# Altium PCB CTA2045v1.2.PcbDoc
Units mil, origin at the board's own origin, x right, y up, seen from the top; angles counter-clockwise.
Board outline 3700.79 x 1574.8 mil, 2 copper layers (Top Layer, Bottom Layer); 16 components, 27 nets, 98 pads, 175 vias.
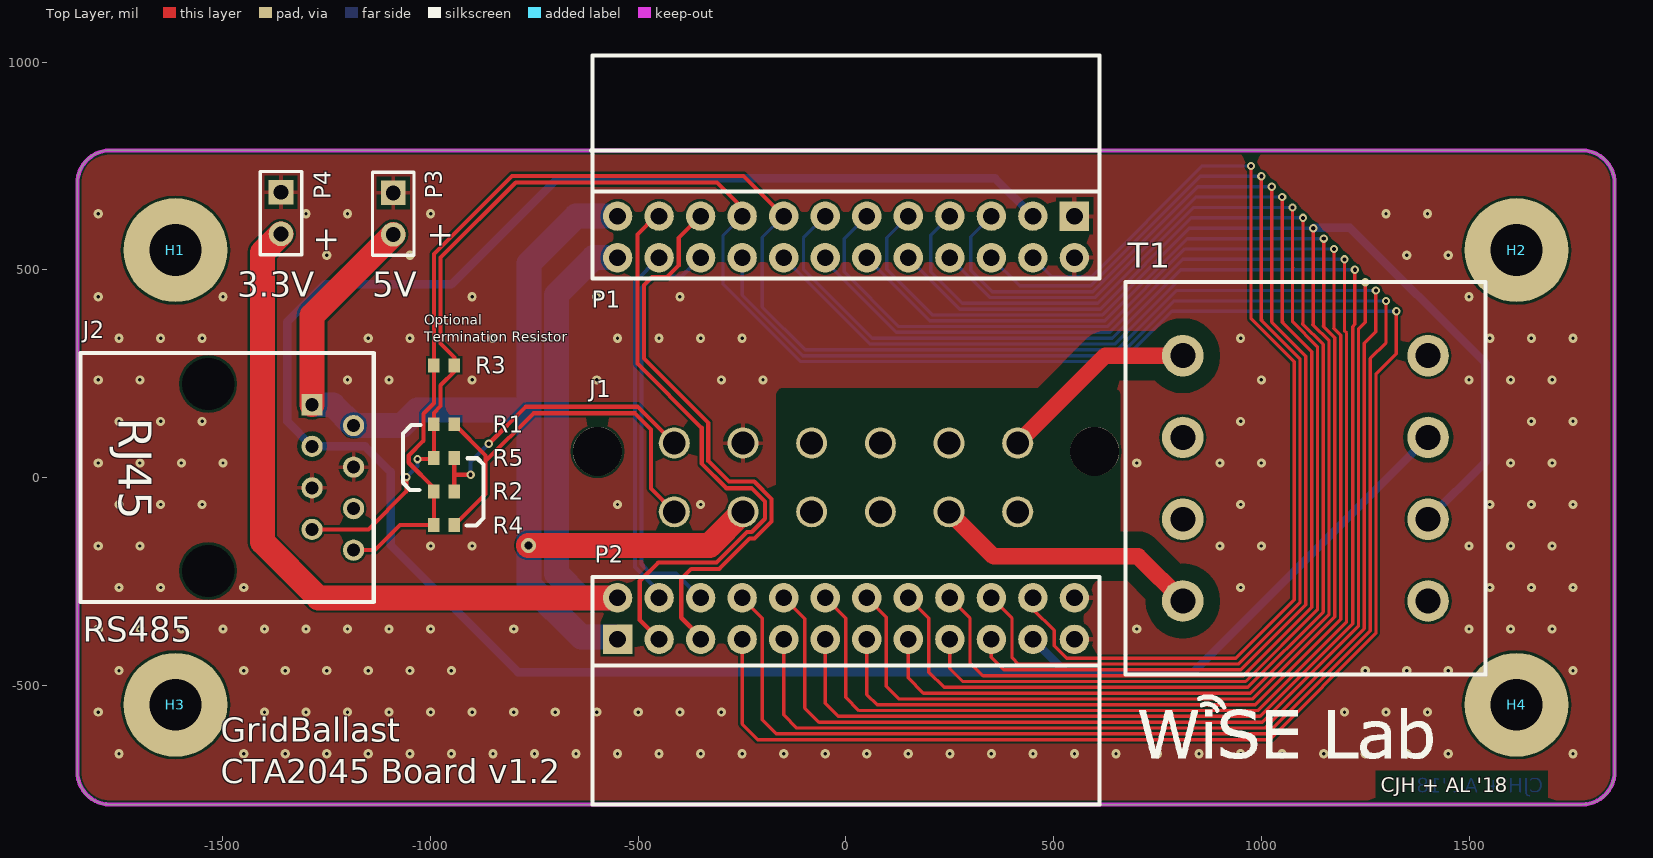
[diagram p0: Top Layer view]
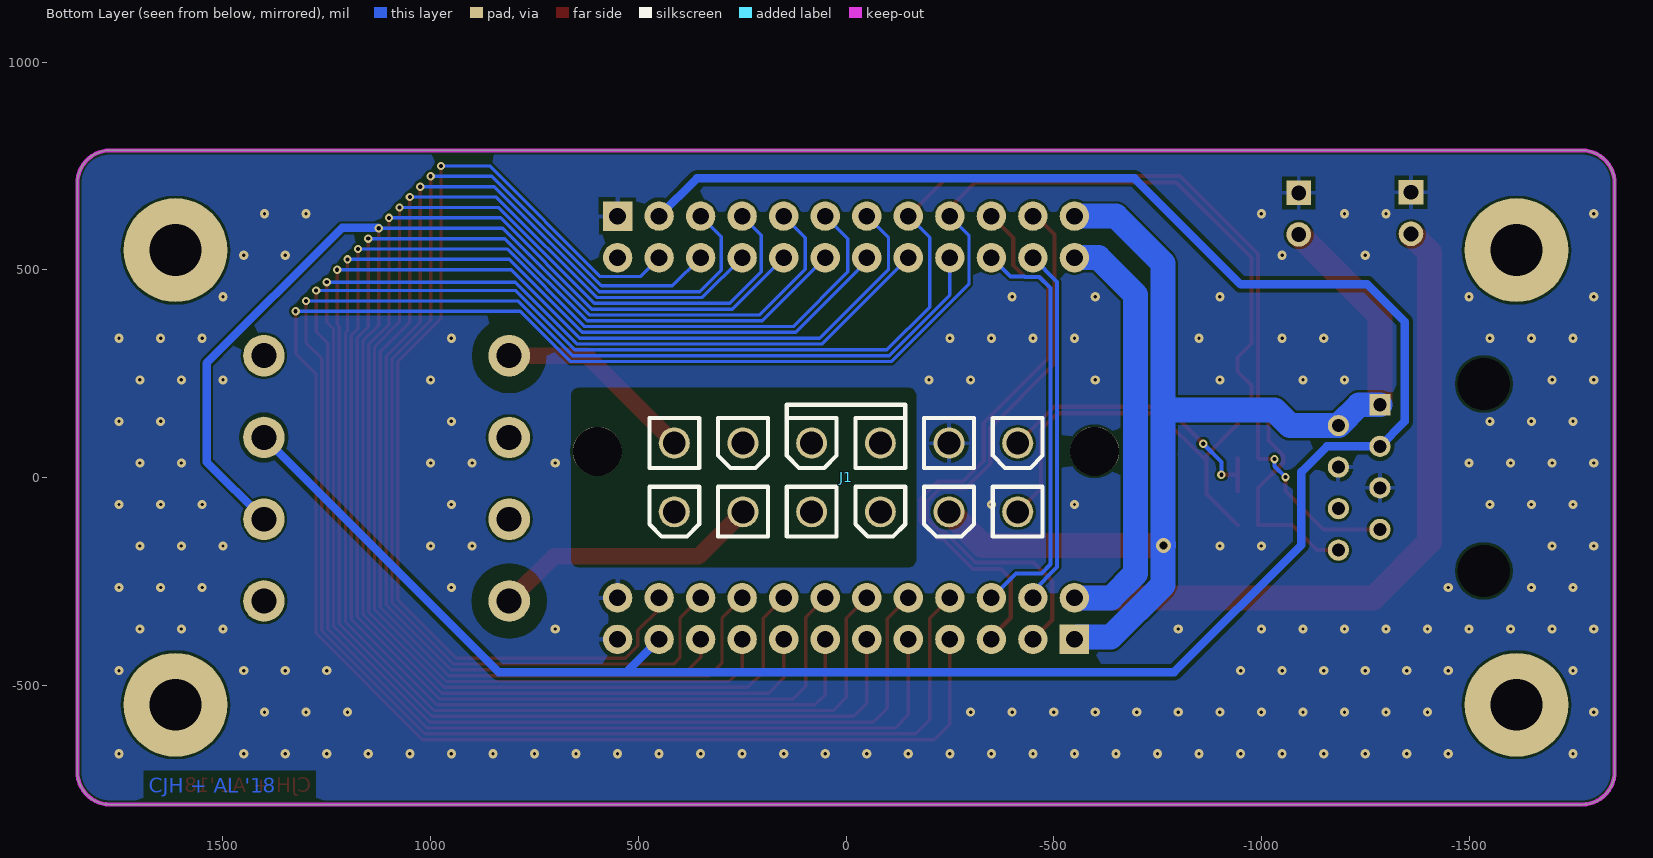
[diagram p1: Bottom Layer view, seen from below]

## Layer stack, top to bottom
Top Solder: solder mask 0.4, Solder Resist, Dk 3.5
Top Layer: signal copper 1.4
Dielectric 1: dielectric 12.6, FR-4, Dk 4.8
Bottom Layer: signal copper 1.4
Bottom Solder: solder mask 0.4, Solder Resist, Dk 3.5

## Board outline
-1771.65,787.4 1771.65,787.4 cw(c1771.65,708.66) 1850.39,708.66 1850.39,-708.66 cw(c1771.65,-708.66) 1771.65,-787.4 -1771.65,-787.4 cw(c-1771.65,-708.66) -1850.39,-708.66 -1850.39,708.66 cw(c-1771.65,708.66)

## Design rules (kind name [scope] priority, off if disabled: settings)
BoardOutlineClearance "BoardOutlineClearance - RJ45" [HasFootprint('RJ45 Unshielded PTH Connector')] p1: gap=0 ignorepadtopadclearanceinfootprint=FALSE
BoardOutlineClearance "BoardOutlineClearance - 4.2mm Pitch" [HasFootprint('2POS 4.2MM PITCH RIGHT ANGLE')] p2: gap=0 ignorepadtopadclearanceinfootprint=FALSE
BoardOutlineClearance "BoardOutlineClearance - Right Angle 0.1inch" [HasFootprint('0.1 INCH 2 ROW 24 POS FEMALE RIGHT-ANGLE HEADER SULLINS') or HasFootprint('0.1 inch 2 row 24 pos male right-angle header Sullins')] p3: gap=0 ignorepadtopadclearanceinfootprint=FALSE
BoardOutlineClearance "BoardOutlineClearance - MicroUSB" [HasFootprint('MicroUSB_TypeB')] p4: gap=0 ignorepadtopadclearanceinfootprint=FALSE
BoardOutlineClearance "BoardOutlineClearance - ESP32" [HasFootprint('ESP-WROOM-32')] p5: gap=0 ignorepadtopadclearanceinfootprint=FALSE
BoardOutlineClearance [All] p6: gap=10 ignorepadtopadclearanceinfootprint=FALSE
Clearance Clearance_1 [InNet('AC_L')] p1: gap=40 ignorepadtopadclearanceinfootprint=FALSE
Clearance Clearance_2 [InNet('AC_N')] p2: gap=40 ignorepadtopadclearanceinfootprint=FALSE
Clearance "Clearance - 60HzAnt" [InNet('60HzAnt')] p3: gap=10 ignorepadtopadclearanceinfootprint=FALSE
Clearance "Clearance - Keepout Ignore" [All vs IsKeepOut] p4: gap=0 ignorepadtopadclearanceinfootprint=FALSE
Clearance "Clearance - Antenna" [InNetClass('RF50')] p5: gap=12 ignorepadtopadclearanceinfootprint=FALSE
Clearance [All] p6: gap=6 ignorepadtopadclearanceinfootprint=FALSE
ComponentClearance "Ignore Enclosure Part" [InComponent('H1')] p1: gap=0 collisioncheckmode=3 verticalgap=0 showdistances=FALSE
DiffPairsRouting [All] p1: maxlimit=10 minlimit=6 mostfreqgap=10 toplayer_minwidth=6 toplayer_maxwidth=15 toplayer_prefwidth=10 bottomlayer_minwidth=6 bottomlayer_maxwidth=15 bottomlayer_prefwidth=10 maxuncoupledlength=500
HoleSize [All] p1: absolutevalues=TRUE maxlimit=500 minlimit=8 maxpercent=80.000 minpercent=20.000
MinimumSolderMaskSliver "MinimumSolderMaskSliver - Jumpers3" [HasFootprint('PAD-JUMPER-3-2OF3_NC_BY_TRACE_YES_SILK_FULL_BOX') vs HasFootprint('PAD-JUMPER-3-2OF3_NC_BY_TRACE_YES_SILK_FULL_BOX')] p1: minsoldermaskwidth=0
MinimumSolderMaskSliver "MinimumSolderMaskSliver - Jumpers2" [HasFootprint('PAD-JUMPER-2-NO_NO_SILK') vs HasFootprint('PAD-JUMPER-2-NO_NO_SILK')] p2: minsoldermaskwidth=0
MinimumSolderMaskSliver "MinimumSolderMaskSliver - Jumpers1" [HasFootprint('PAD-JUMPER-2-NC_BY_TRACE_NO_SILK') vs HasFootprint('PAD-JUMPER-2-NC_BY_TRACE_NO_SILK')] p3: minsoldermaskwidth=0
MinimumSolderMaskSliver "MinimumSolderMaskSliver - FTDI" [HasFootprint('PQFN5X5-32_V_FTDI_BIG_VIAS_LEADS') vs HasFootprint('PQFN5X5-32_V_FTDI_BIG_VIAS_LEADS')] p4: minsoldermaskwidth=0
MinimumSolderMaskSliver [All] p5: minsoldermaskwidth=4
NetAntennae [Not InNet('60HzAnt')] p1: netantennaetolerance=0
PolygonConnect "PolygonConnect - ViaStitching" [IsStitchingVia] p1: connectstyle=Direct reliefconductorwidth=10 reliefentries=4 polygonreliefangle="90 Angle" airgapwidth=10
PolygonConnect [All] p2: connectstyle=Relief reliefconductorwidth=10 reliefentries=4 polygonreliefangle="90 Angle" airgapwidth=10
RoutingVias [All] p1: holewidth=10 width=20 viastyle="Through Hole" minholewidth=8 minwidth=16 maxholewidth=50 maxwidth=100
ShortCircuit "ShortCircuit - FTDI" [HasFootprint('PQFN5X5-32_V_FTDI_BIG_VIAS_LEADS') and IsPad vs HasFootprint('PQFN5X5-32_V_FTDI_BIG_VIAS_LEADS') and (IsPolygon or IsRegion)] p1: allowed=TRUE
ShortCircuit ExemptJumpers [HasFootprint('PAD-JUMPER-2-NC_BY_TRACE_NO_SILK') or HasFootprint('PAD-JUMPER-3-2OF3_NC_BY_TRACE_YES_SILK_FULL_BOX')] p2: allowed=TRUE
ShortCircuit [All] p3: allowed=FALSE
SilkToSilkClearance [All] p1: silktosilkclearance=5
SilkToSolderMaskClearance [IsPad] p1: minsilkscreentomaskgap=0 clearancetoexposedcopper=TRUE
SolderMaskExpansion [All] p1: expansion=2
Width "Width - Antenna" [InNetClass('RF50')] p1: maxlimit=10000 minlimit=6 preferedwidth=10 impedancedriven=TRUE minimp=50.000000 maximp=50.000000 favimp=50.000000
Width [All] p2: maxlimit=10000 minlimit=6 preferedwidth=10 minimp=50.000000 maximp=50.000000 favimp=50.000000
22 further rules are at their usual default settings.

## Components (designator, comment, footprint, x,y, rotation, side; value= is the part's Value field where it differs from the comment)
H1 "1/8in Hole by 1/4in Ring Fastener" "1/8in Fastener Hole" -1614.17,547.24 r0 top locked
H2 "1/8in Hole by 1/4in Ring Fastener" "1/8in Fastener Hole" 1614.17,547.24 r0 top locked
H3 "1/8in Hole by 1/4in Ring Fastener" "1/8in Fastener Hole" -1614.17,-547.24 r0 top locked
H4 "1/8in Hole by 1/4in Ring Fastener" "1/8in Fastener Hole" 1614.17,-547.24 r0 top locked
J1 "TE 1-1586586-2" "12POS 4.2mm Pitch Vertical" 0,0 r0 bottom locked
J2 "RS485" "RJ45 Unshielded PTH Connector" -1535.43,0 r270 top locked
P1 "0.1\" Pitch, 2 Row, 24 Pos, Male Right-Angle" "0.1 inch 2 row 24 pos male right-angle header Sullins" 0,579.13 r180 top locked
P2 "0.1\" Pitch, 2 Row, 24 Pos, Female, Right-Angle" "0.1 inch 2 row 24 pos female right-angle header Sullins" 0,-339.76 r0 top locked
P3 "5V" HDR1X2 -1090,685 r270 top
P4 "3.3V" HDR1X2 -1360.15,686.35 r270 top
R1 "0" "RESC1608X06L - RES0603" -967.58,128 r0 top
R2 "0" "RESC1608X06L - RES0603" -967.58,-33.86 r0 top
R3 "120" "RESC1608X06L - RES0603" -967.58,270 r180 top
R4 "0" "RESC1608X06L - RES0603" -967.58,-114.79 r0 top
R5 "0" "RESC1608X06L - RES0603" -967.58,47.07 r0 top
T1 "SPK00304" SPK003 1106.1,-2.15 r270 top

## Footprints (in the part's own frame and the unit in brackets; to place one, negate y for a bottom-side part, rotate by r counter-clockwise, add the part's x,y. Pads: shape width x height; smd on the part's side, far side on the other; paste and mask are expansions set on the pad)
"0.1 inch 2 row 24 pos female right-angle header Sullins" [mm] "Sullins 0.1\" Dual row 24 position female right-angle header"
  rect 1.8x1.8 hole 1.02: 1(-13.97,-1.27)
  round 1.8 hole 1.02: 2(-13.97,1.27) 3(-11.43,-1.27) 4(-11.43,1.27) 5(-8.89,-1.27) 6(-8.89,1.27) 7(-6.35,-1.27) 8(-6.35,1.27) 9(-3.81,-1.27) 10(-3.81,1.27) 11(-1.27,-1.27) 12(-1.27,1.27) 13(1.27,-1.27) 14(1.27,1.27) 15(3.81,-1.27) 16(3.81,1.27) 17(6.35,-1.27) 18(6.35,1.27) 19(8.89,-1.27) 20(8.89,1.27) 21(11.43,-1.27) 22(11.43,1.27) 23(13.97,-1.27) 24(13.97,1.27)
  silkscreen extent -15.5,-11.37 15.5,2.54, body extent -15.49,-11.34 15.49,1.5, height 5.08
"0.1 inch 2 row 24 pos male right-angle header Sullins" [mm] "Sullins 0.1\" Dual row 24 position male right-angle header"
  rect 1.8x1.8 hole 1.02: 1(-13.97,-1.27)
  round 1.8 hole 1.02: 2(-13.97,1.27) 3(-11.43,-1.27) 4(-11.43,1.27) 5(-8.89,-1.27) 6(-8.89,1.27) 7(-6.35,-1.27) 8(-6.35,1.27) 9(-3.81,-1.27) 10(-3.81,1.27) 11(-1.27,-1.27) 12(-1.27,1.27) 13(1.27,-1.27) 14(1.27,1.27) 15(3.81,-1.27) 16(3.81,1.27) 17(6.35,-1.27) 18(6.35,1.27) 19(8.89,-1.27) 20(8.89,1.27) 21(11.43,-1.27) 22(11.43,1.27) 23(13.97,-1.27) 24(13.97,1.27)
  silkscreen extent -15.5,-11.1 15.6,2.54, body extent -15.24,-11.12 15.24,1.6, height 5.04
"1/8in Fastener Hole" [mil]
  round 250 hole 125: 1(0,0)
"12POS 4.2mm Pitch Vertical" [mm] "TE Connectivity 1-1586586-2"
  round 3 hole 3 unplated: 0(-15.2,-1.6) 0(15.2,-1.6)
  round 1.9 hole 1.4: 1(-10.5,2.1) 2(-6.3,2.1) 3(-2.1,2.1) 4(2.1,2.1) 5(6.3,2.1) 6(10.5,2.1) 7(-10.5,-2.1) 8(-6.3,-2.1) 9(-2.1,-2.1) 10(2.1,-2.1) 11(6.3,-2.1) 12(10.5,-2.1)
  silkscreen extent -12.02,-4.44 12.02,3.62
HDR1X2 [mm] "Connector; Header; 2 Position"
  rect 1.5x1.5 hole 0.9: 1(0,0)
  round 1.5 hole 0.9: 2(2.54,0)
  silkscreen extent -1.27,-1.27 3.81,1.27
"RESC1608X06L - RES0603" [mm] "Chip Resistor, 2-Leads, Body 1.60x0.80mm, IPC High Density"
  rect 0.7x0.85 smd: 1(-0.625,0) 2(0.625,0)
  body extent -0.87,-0.48 0.87,0.48, height 0.55
"RJ45 Unshielded PTH Connector" [mm] "Amphenol 54601-908WPLF Unshielded RJ45 PTH Connector"
  round 0 hole 3.2 unplated: 0(-5.716,0) 0(5.716,0)
  rect 1.3x1.3 hole 0.8: 1(-4.444,6.35)
  round 1.3 hole 0.8: 2(-3.174,8.89) 3(-1.904,6.35) 4(-0.634,8.89) 5(0.636,6.35) 6(1.906,8.89) 7(3.176,6.35) 8(4.446,8.89)
  silkscreen extent -7.62,-7.8 7.62,10.12, body extent -7.62,-7.8 7.62,10.2, height 11.5
SPK003 [mm]
  round 2.54 hole 1.524: 1(-7.5,-7.5) 2(-2.5,-7.5) 3(2.5,-7.5) 4(7.5,-7.5) 5(-7.5,7.5) 6(-2.5,7.5) 7(2.5,7.5) 8(7.5,7.5)
  silkscreen extent -12,-11 12,11, body extent -12,-11 12,11, height 15

## Part data
H1 H2 H3 H4: library part "1/8in by 1/4in Fastner Hole"
J1: library part "12POS 4.2mm Pitch Vertical", "TE Connectivity 1-1586586-2", Supplier Part Number 1=70041598, Supplier 1=Allied, Supplier 2=Digi-Key, Supplier Part Number 2=1-1586586-2-ND
J2: library part "RJ45 Unshielded PTH Connector", "Amphenol RJ45 Unshielded Through-Hole Connector", Colour=Black, Contact Resistance=30mR, Current Rating=1A, Flammability Rating="UL94 V-0", Insulation Resistance=500MR, Manufacturer="Amphenol FCI", Manufacturer Part Number=54601-908WPLF, Max Operating Temperature=125°C, Min Operating Temperature=-65°C, Package Quantity=200, Supplier Part Number 1=609-5081-ND, Voltage Rating=1kV, ComponentLink1Description=https://datasheet.ciiva.com/9396/c-bmj-0051-9396388.pdf, ComponentLink1URL=https://datasheet.ciiva.com/9396/c-bmj-0051-9396388.pdf, ComponentLink2Description=https://datasheet.ciiva.com/26824/getdatasheetpartid-465238-26824373.pdf, ComponentLink2URL=https://datasheet.ciiva.com/26824/getdatasheetpartid-465238-26824373.pdf, ComponentLink3Description=https://datasheet.ciiva.com/1108/c-bmj-0051-1108424.pdf, ComponentLink3URL=https://datasheet.ciiva.com/1108/c-bmj-0051-1108424.pdf, ComponentLink4Description=https://datasheet.ciiva.com/15058/c-bmj-0051-15058750.pdf, ComponentLink4URL=https://datasheet.ciiva.com/15058/c-bmj-0051-15058750.pdf, ComponentLink5Description=https://datasheet.ciiva.com/16650/c-bmj-0051-16650286.pdf, ComponentLink5URL=https://datasheet.ciiva.com/16650/c-bmj-0051-16650286.pdf, ComponentLink6Description=https://datasheet.ciiva.com/7629/c-bmj-0051-7629183.pdf, ComponentLink6URL=https://datasheet.ciiva.com/7629/c-bmj-0051-7629183.pdf, Connector Type=RJ45, Contact Material=Bronze,Copper, Contact Plating=Nickel,Gold, Depth=18mm, Direction=Down, Gender=Male, Housing Colour=Black, Housing Material=Polyamide, Lead Free="Lead Free", Length=15.24mm, Mount="Through Hole", Number of Contacts=8, Number of Ports=1, Number of Positions=8, Number of Positions Loaded=8, Number of Rows=1, Orientation="Right Angle", Packaging=Rail/Tube, Pitch=2.54mm, Pricing 2="1=0.51, 10=0.377, 50=0.377, 100=0.362, 1000=0.26, 10000=0.212 (USD)", Radiation Hardening=No, REACH SVHC="No SVHC", Shielding=Unshielded, Stock 2=0, Supplier 1=Digi-Key, Supplier 2=Mouser, Supplier Part Number 2=649-54601-908WPLF, Termination="Through Hole"
P1: library part "0.1\" 2 row 24 position male right-angle header sullins", "Sullins 0.1\" 2 row 24 position male right-angle header", Supplier Part Number 1=S2112EC-12-ND, Gender=Male, Pitch=2.54mm, Positions=24, Rows=2, Supplier 1=Digi-Key
P2: library part "0.1\" 2 row 24 position female right-angle header sullins", "Sullins 0.1\" 2 row 24 position female right-angle header", Supplier Part Number 1=S5526-ND, Pitch=2.54mm, Positions=24, Rows=2, Supplier 1=Digi-Key, Supplier 2=Digi-Key, Supplier Part Number 2=S5565-ND
P3 P4: library part "Header 2", "Header, 2-Pin", LatestRevisionDate=17-Jul-2002, LatestRevisionNote="Re-released for DXP Platform.", Publisher="Altium Limited"
R1 R2 R4 R5: library part "RES0603 0 Jumper 1/10W", "SMT 0603 Ceramic Resistor", Power=1/10W, Supplier Part Number 1=311-0.0GRCT-ND, Tolerance=Jumper, Supplier 1=Digi-Key, Supplier 2=Digi-Key, Supplier Part Number 2=P0.0GCT-ND
R3: library part "RES0603 120 1% 1/10W", "SMT 0603 Ceramic Resistor", Supplier Part Number 1=311-120HRCT-ND, Supplier 1=Digi-Key, Supplier 2=Digi-Key, Supplier 3=Digi-Key, Supplier Part Number 2=RMCF0603FT120RCT-ND, Supplier Part Number 3=YAG3563CT-ND
T1: "Standard PCB-Transformers"

## Via types
v1: diameter 22, hole 8, Top Layer to Bottom Layer, tented both sides, 155 vias
v2: diameter 20, hole 10, Top Layer to Bottom Layer, tented both sides, 19 vias
v3: diameter 36, hole 20, Top Layer to Bottom Layer, tented both sides, 1 vias

## Nets (pads, with @x,y where several pads share a name; then routed paths per layer and width w, separated by ;. In a path a pad name is that pad's centre, name@x,y a point inside that pad or via, vN(x,y) a via of type N, cw(c..) or ccw(c..) an arc to the next point about the centre after c; other vN are vias at no path point)
3.3V: P1.24 P2.2 P4.2 | length 2697
  Top Layer w60: P4.2 -1405,541.5 -1405,-155 -1270.24,-289.76 P2.2
  Bottom Layer w60: P2.2 -638.57,-289.76 -696.97,-231.36 -696.97,439.75 -607.59,529.13 P1.24
5V: J1.2 J2.1 J2.2 P1.23 P2.1 P3.2 | length 2889.9
  Top Layer w60: J2.1 -1285.43,389.57 P3.2 ; v3(-764.12,-163.57) -328.92,-163.57 J1.2
  Bottom Layer w60: J2.1 -1235.43,174.96 J2.2 -1068.97,124.96 -1031.38,162.55 -764.22,162.55 -762.97,161.3 ; v3(-764.12,-163.57) v3@-764.12,-159.52 ; v3@-762.97,-163.57 -762.97,-258.7 -637.37,-384.31 -555.46,-384.31 P2.1 ; v3@-762.97,-159.52 -762.97,49.74 ; -762.97,61.3 -762.97,161.3 ; P1.23 -649.53,629.13 -762.97,515.69 -762.97,161.3
60HzAnt: J2.3 P1.3 P2.21 T1.6 | length 5660.9
  Bottom Layer w20: P2.21 528.88,-468.64 ; P1.3 359.13,720 -695,720 -950,465 -1255,465 -1345,375 -1345,134.53 J2.3 -1157.63,74.96 -1096.14,13.46 -1096.14,-162.52 -790.02,-468.64 528.88,-468.64 ; T1.6 836.46,-468.64 528.88,-468.64
60HzAntRef: P1.9 P2.15 T1.7 | length 4436.7
  Top Layer w8: P2.15 150,-482.67 186.53,-519.2 973.47,-519.2 1162.97,-329.69 1162.97,329.01 1124.01,367.97 1125,368.96 v2(1125,600)
  Bottom Layer w8: P1.9 97.96,577.1 97.96,500.97 207.67,391.26 617.64,391.26 826.37,600 v2(1125,600)
  Bottom Layer w20: v2(1125,600) 1126,601 1213.17,601 1539.17,275 1539.17,37.22 T1.7
AC_L: J1.12 T1.1 | length 484.6
  Top Layer w40: J1.12 623.84,293.13 T1.1
AC_N: J1.5 T1.4 | length 651.7
  Top Layer w40: J1.5 355.35,-190 703.4,-190 T1.4
CT_N: P1.19 P2.5 | length 1414.8
  Top Layer w10: P2.5 -350,-384.28 -396.64,-337.64 -396.64,-244.51 -372.7,-220.57 -305.31,-220.57 -231.87,-147.13 -220.27,-147.13 -179.19,-106.05 -179.19,-51.62 -220.96,-9.85 -281.69,-9.85 -331.44,39.9 -331.44,131.27 -486.2,286.03 -486.2,463.22 -466.72,482.7 -430.77,482.7 -402.79,510.68 -402.79,576.35 P1.19
CT_P: P1.21 P2.3 | length 1440.8
  Top Layer w10: P2.3 -496.43,-343.33 -496.43,-249.14 -451.86,-204.57 -311.94,-204.57 -238.5,-131.13 -226.89,-131.13 -195.19,-99.43 -195.19,-58.24 -227.58,-25.85 -288.32,-25.85 -347.44,33.27 -347.44,119.51 -502.2,274.27 -502.2,585.06 -458.12,629.13 P1.21
GND: J1.8 J2.4 J2.5 P1.1 P1.2 P2.23 P2.24 P3.1 P4.1
  other v1: -1750,-665 -1450,-665 -1350,-665 -1250,-665 -1150,-665 -1050,-665 -950,-665 -850,-665 -750,-665 -650,-665 -550,-665 -450,-665 -350,-665 -250,-665 -150,-665 -50,-665 50,-665 150,-665 250,-665 350,-665 450,-665 550,-665 650,-665 750,-665 850,-665 950,-665 1050,-665 1150,-665 1250,-665 1350,-665 1450,-665 1750,-665 -1800,-565 -1400,-565 -1300,-565 -1200,-565 -1100,-565 -1000,-565 -900,-565 -800,-565 -700,-565 -600,-565 -500,-565 -400,-565 -300,-565 1200,-565 1300,-565 1400,-565 -1750,-465 -1450,-465 -1350,-465 -1250,-465 -1150,-465 -1050,-465 -950,-465 1250,-465 1350,-465 1450,-465 1750,-465 -1800,-365 -1700,-365 -1600,-365 -1500,-365 -1400,-365 -1300,-365 -1200,-365 -1100,-365 -1000,-365 -800,-365 700,-365 1500,-365 1600,-365 1700,-365 -1750,-265 -1650,-265 -1450,-265 950,-265 1550,-265 1650,-265 1750,-265 -1800,-165 -1700,-165 -1000,-165 -900,-165 900,-165 1000,-165 1500,-165 1600,-165 1700,-165 -1750,-65 -1650,-65 -1550,-65 -550,-65 -350,-65 950,-65 1550,-65 1650,-65 1750,-65 -1800,35 -1700,35 -1600,35 -1500,35 700,35 900,35 1000,35 1600,35 1700,35 -1750,135 -1650,135 -1550,135 950,135 1650,135 1750,135 -1800,235 -1700,235 -1200,235 -1100,235 -900,235 -600,235 -300,235 -200,235 1000,235 1500,235 1600,235 1700,235 -1750,335 -1650,335 -1550,335 -1150,335 -1050,335 -850,335 -550,335 -450,335 -350,335 -250,335 950,335 1550,335 1650,335 1750,335 -1800,435 -1500,435 -900,435 -600,435 -400,435 1500,435 -1250,535 -1050,535 1350,535 1450,535 -1800,635 -1300,635 -1200,635 -1000,635 1300,635 1400,635
GPIO1: P1.18 P2.8 | length 4459
  Top Layer w8: P2.8 -201.31,-338.46 -201.31,-583.69 -167.8,-617.2 1014.06,-617.2 1261.71,-369.54 1261.71,286.52 1300,324.8 v2(1300,425)
  Bottom Layer w8: P1.18 -250,439.13 -104.14,293.26 658.23,293.26 789.96,425 v2(1300,425)
GPIO2: P1.16 P2.10 | length 4112
  Top Layer w8: P2.10 -99.26,-340.5 -99.26,-555.09 -65.15,-589.2 1002.46,-589.2 1233.71,-357.94 1233.71,357.16 1250,373.44 v2(1250,470.29)
  Bottom Layer w8: P1.16 57.87,321.26 646.63,321.26 795.66,470.29 v2(1250,470.29)
GPIO3: P1.14 P2.12 | length 3844.2
  Top Layer w8: P2.12 -0.9,-338.86 -0.9,-529.12 31.18,-561.2 990.86,-561.2 1204.97,-347.09 1204.97,347.97 1200,352.94 v2(1200,525)
  Bottom Layer w8: P1.14 -50,520.31 121.05,349.26 635.03,349.26 810.77,525 v2(1200,525)
GPIO4: P1.12 P2.14 | length 3574.5
  Top Layer w8: P2.14 97.13,-336.89 97.13,-503.02 127.3,-533.2 979.27,-533.2 1176.97,-335.49 1176.97,336.37 1148.78,364.55 1150,365.77 v2(1150,575)
  Bottom Layer w8: P1.12 201.87,377.26 623.43,377.26 821.17,575 v2(1150,575)
GPIO5: P1.10 P2.16 | length 3301.6
  Top Layer w8: P2.16 199.43,-339.19 199.43,-468.56 236.06,-505.2 967.67,-505.2 1148.97,-323.89 1148.97,320.19 1098.77,370.39 1100,371.62 v2(1100,625)
  Bottom Layer w8: P1.10 273.87,405.26 611.84,405.26 831.57,625 v2(1100,625)
GPIO6: P1.8 P2.18 | length 3037.9
  Top Layer w8: P2.18 298.5,-338.26 298.5,-445.95 329.75,-477.2 956.07,-477.2 1120.97,-312.3 1120.97,302.57 1050.12,373.42 1051.77,375.08 1050,376.85 v2(1050,675)
  Bottom Layer w8: P1.8 345.87,433.26 600.24,433.26 841.97,675 v2(1050,675)
GPIO7: P1.6 P2.20 | length 2779.1
  Top Layer w8: P2.20 399.72,-339.49 399.72,-434.59 414.32,-449.2 944.47,-449.2 1092.97,-300.7 1092.97,284.94 999.81,378.1 1001.37,379.66 1000,381.02 v2(1000,725)
  Bottom Layer w8: P1.6 417.87,461.26 588.64,461.26 852.38,725 v2(1000,725)
GPIO8: P1.4 P2.22 | length 2527.2
  Top Layer w8: P2.22 450,-316.99 501.25,-368.24 501.25,-405.27 531.18,-435.2 938.67,-435.2 1078.97,-294.9 1078.97,278.33 975.75,381.55 975.97,381.77 975,382.75 v2(975,750)
  Bottom Layer w8: P1.4 495.43,483.7 591.28,483.7 857.58,750 v2(975,750)
I2C_SCL: P1.20 P2.6 | length 1013.1
  Bottom Layer w10: P2.6 -408.85,-230.91 -470.36,-230.91 -492.24,-209.03 -492.24,455.76 -465.3,482.7 -430.77,482.7 -429.97,483.5 -395.64,483.5 P1.20
I2C_SDA: P1.22 P2.4 | length 867.1
  Bottom Layer w10: P2.4 -450,-274.16 -508.24,-215.92 -508.24,470.89 P1.22
Leak_N: P1.11 P2.13 | length 3736.1
  Top Layer w8: P2.13 50,-522.55 74.65,-547.2 985.06,-547.2 1190.97,-341.29 1190.97,342.17 1174.4,358.74 1175,359.34 v2(1175,550)
  Bottom Layer w8: P1.11 -4.57,574.57 -4.57,494.68 126.85,363.26 629.23,363.26 815.97,550 v2(1175,550)
Leak_P: P1.13 P2.11 | length 3997.4
  Top Layer w8: P2.11 -50,-543.56 -18.37,-575.2 996.66,-575.2 1219.71,-352.15 1219.71,362.96 1225,368.24 v2(1225,500)
  Bottom Layer w8: P1.13 -102.51,576.62 -102.51,501.45 63.67,335.26 640.83,335.26 805.57,500 v2(1225,500)
RFU1: P1.7 P2.17 | length 3184.6
  Top Layer w8: P2.17 250,-459.91 281.29,-491.2 961.87,-491.2 1134.97,-318.09 1134.97,314.39 1074.99,374.37 1074.99,504.38 1076.01,505.4 1075,506.41 v2(1075,650)
  Bottom Layer w8: P1.7 204.15,583.28 204.15,494.79 279.67,419.26 606.04,419.26 836.77,650 v2(1075,650)
RFU2: P1.5 P2.19 | length 2920.1
  Top Layer w8: P2.19 350,-432.84 380.36,-463.2 950.27,-463.2 1106.97,-306.5 1106.97,291.85 1024.78,374.05 1025,374.27 v2(1025,700)
  Bottom Layer w8: P1.5 300.05,579.19 300.05,498.88 351.67,447.26 594.44,447.26 847.18,700 v2(1025,700)
RS485_1: J1.1 R1.2 R4.2 | length 988.6
  Top Layer w10: R4.2 -867.64,-39.47 -867.64,39.23 ; R1.2 -867.64,52.67 -867.64,39.23 ; J1.1 -469.58,-26.49 -469.58,115.66 -508.32,154.41 -752.47,154.41 -867.64,39.23
RS485_2: J1.7 R2.2 R5.2 | length 732.8
  Top Layer w10: R2.2 -942.97,6.6 ; R5.2 -942.97,6.6 ; v2(-903.68,6.6) -942.97,6.6 ; v2(-859.98,81.22) -770.8,170.41 -501.69,170.41 -413.96,82.68 J1.7
  Bottom Layer w10: v2(-903.68,6.6) -903.68,37.52 v2(-859.98,81.22)
RS4855_A: J2.8 P1.15 P2.9 R2.1 R3.2 R4.1 | length 6217.4
  Top Layer w8: P2.9 -150,-571.77 -118.57,-603.2 1008.26,-603.2 1247.71,-363.74 1247.71,322.73 1275.67,350.69 v2(1275.67,450)
  Top Layer w10: J2.8 -1133.94,-175.04 -1073.69,-114.79 R4.1 R2.1 -992.18,-25 -1052.63,35.45 -1052.63,52.84 -1016.95,88.52 -1016.95,106.71 -1016.96,153.41 -991.82,178.56 -991.82,538.18 -804,726 -246.87,726 P1.15
  Bottom Layer w8: P1.15 -201.41,577.72 -201.41,410.34 -98.34,307.26 652.43,307.26 795.16,450 v2(1275.67,450)
RS4855_B: J2.7 P1.17 P2.7 R1.1 R3.1 R5.1 | length 6337.7
  Top Layer w8: P2.7 -250,-593.66 -212.47,-631.2 1019.86,-631.2 1275.71,-375.34 1275.71,248.51 1325,297.79 v2(1325,400)
  Top Layer w10: J2.7 -1149.91,-125.04 -1057.93,-33.07 v2(-1057.93,0.71) ; v2(-1031.63,44.15) -995.11,44.15 R5.1 R1.1 -992.18,155.56 -975.82,171.93 -975.82,221.99 -942.22,255.58 -942.22,288.53 -975.82,322.13 -975.82,529.18 -795,710 -310.34,710 -250,649.66 P1.17 ; P2.7 P2.7@-250,-387.16
  Bottom Layer w8: P1.17 -295.95,583.19 -295.95,465.28 -109.94,279.26 664.03,279.26 784.76,400 v2(1325,400)
  Bottom Layer w10: v2(-1057.93,0.71) -1031.63,27.02 v2(-1031.63,44.15)
pads on no net: H1.1 H2.1 H3.1 H4.1 J1.0 J1.3 J1.4 J1.6 J1.9 J1.10 J1.11 J2.0 J2.6 T1.2 T1.3 T1.5 T1.8

## Polygon pours and split planes (outlines as drawn)
GND on Bottom Layer "Bottom Layer-GND" (solid, remove dead copper, pour order 1): -1771.65,787.4 1771.65,787.4 cw(c1771.65,708.66) 1850.39,708.66 1850.39,-708.66 cw(c1771.65,-708.66) 1771.65,-787.4 -1771.65,-787.4 cw(c-1771.65,-708.66) -1850.39,-708.66 -1850.39,708.66 cw(c-1771.65,708.66)
GND on Top Layer "Top Layer-GND" (solid, remove dead copper, pour order 0): -1771.65,787.4 1771.65,787.4 cw(c1771.65,708.66) 1850.39,708.66 1850.39,-708.66 cw(c1771.65,-708.66) 1771.65,-787.4 -1771.65,-787.4 cw(c-1771.65,-708.66) -1850.39,-708.66 -1850.39,708.66 cw(c-1771.65,708.66)

## Keep-outs
Keep-Out Layer:
  the board outline again, w10

## Other copper
Top Layer:
  region: -1614.17,547.24
  text "CJH + AL '18" at 1287.23,-758.2 h35
Bottom Layer:
  text "CJH + AL '18" at 1678.47,-758.47 h35
Multi-Layer:
  pour cut-out: -149.21,216.54 641.73,216.54 cw(c641.73,196.85) 661.42,196.85 661.42,-196.85 cw(c641.73,-196.85) 641.73,-216.54 -149.21,-216.54 cw(c-149.21,-196.86) -168.89,-196.86 -168.89,196.86 cw(c-149.21,196.86)

## Silkscreen, mask and mechanical layers (free items; w line width, h text height)
Top Overlay:
  drawing of 1299 lines, arcs and shapes, not listed
  text "+" at -1020,615 h100 r270
  text "+" at -1295,605 h100 r270
  text "Optional / Termination Resistor" at -1015.04,318.85 h40
  text "GridBallast / CTA2045 Board v1.2" at -1505,-755 h100
  text "CJH + AL '18" at 1287.23,-758.2 h35
Mechanical 15:
  circle w10: c-1614.17,547.24 r62.76
  circle w10: c-1614.17,-547.24 r62.76
  circle w10: c1614.17,547.24 r62.76
  circle w10: c1614.17,-547.24 r62.76
  lines w10: -1850.39,-708.66 ccw(c-1771.65,-708.66) -1771.65,-787.4 1771.65,-787.4 ccw(c1771.65,-708.66) 1850.39,-708.66 1850.39,708.66 ccw(c1771.65,708.66) 1771.65,787.4 -1771.65,787.4 ccw(c-1771.65,708.66) -1850.39,708.66 -1850.39,-708.66

## Dimensions
1850.39,-708.66 to -1850.39,-708.66 on Mechanical 1
-1771.65,787.4 to -1771.65,-787.4 on Mechanical 1

## Text inside footprints (layer, text, board x,y; h text height)
J1: Mechanical 1 "Conn. Mounts Upward" at -545,260 h60 r180
J2: Top Overlay "RJ45" at -1751.05,143.72 h78.74 r270
P1: Mechanical 1 "5.29MM / FROM / CENTER" at -88,964.87 h39.37 r270
P2: Mechanical 1 "11.37MM / FROM / CENTER" at 88,-725.5 h39.37 r90